# Altium PCB 7segment.PcbDoc
Units mm, origin at the board's own origin, x right, y up, seen from the top; angles counter-clockwise.
Board outline 90.04 x 52.07 mm, 2 copper layers (Top Layer, Bottom Layer); 11 components, 20 nets, 44 pads, 0 vias.
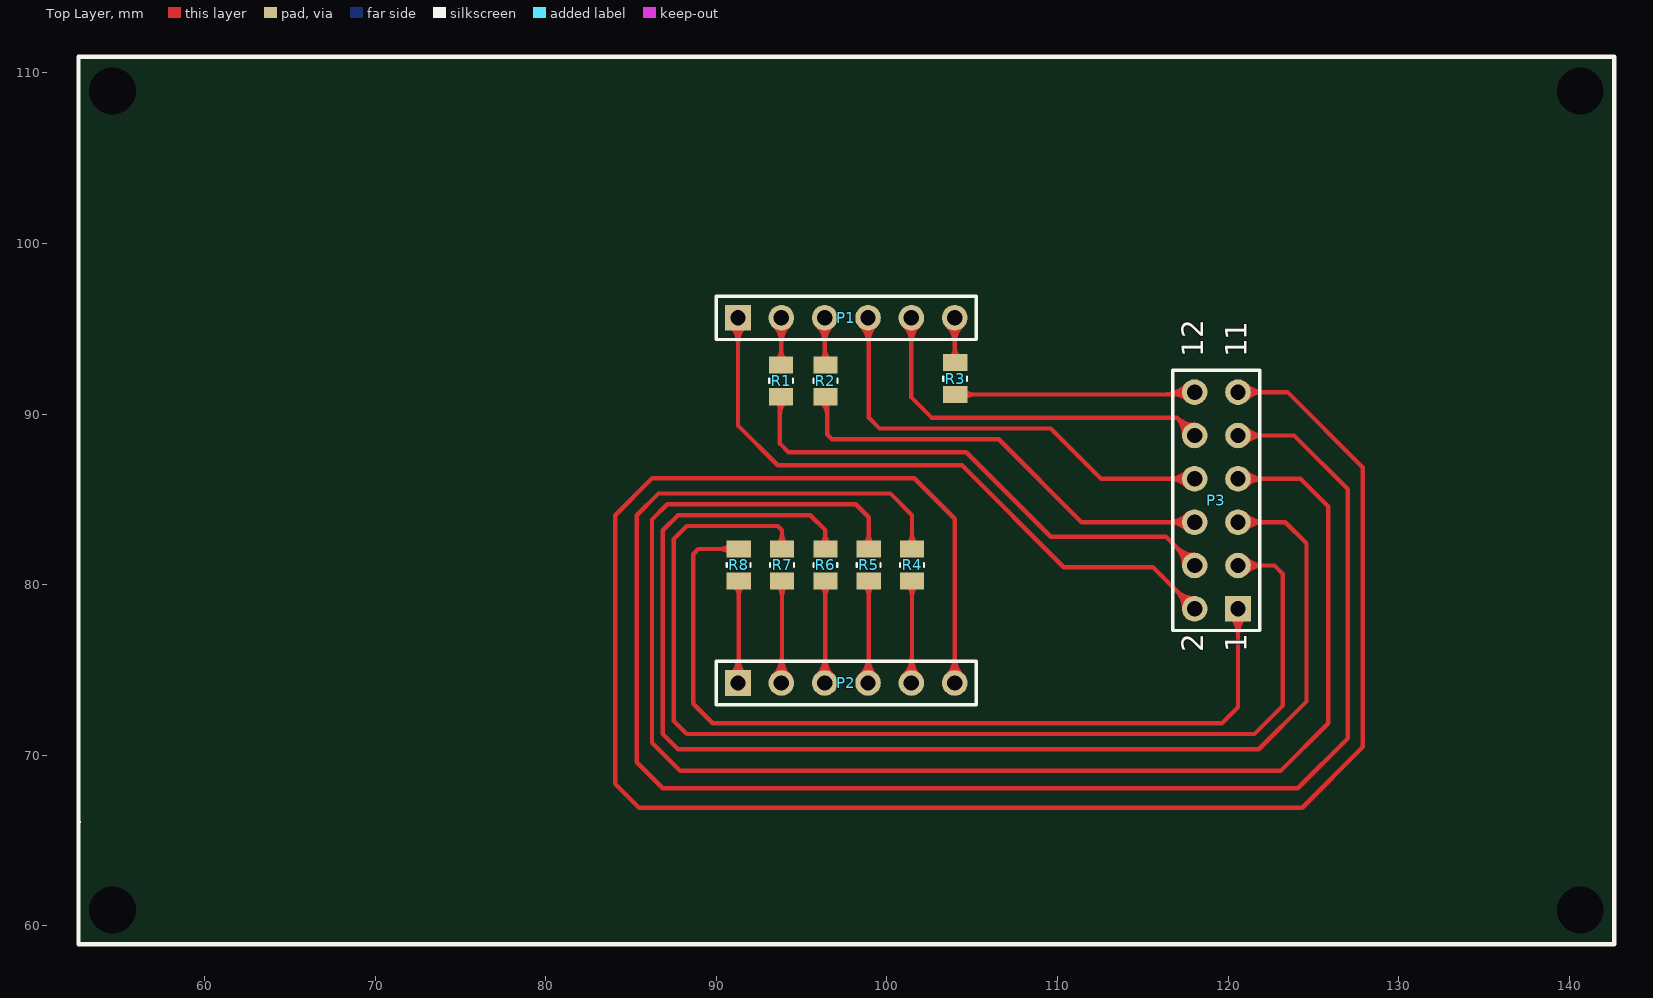
[diagram p0: Top Layer view]
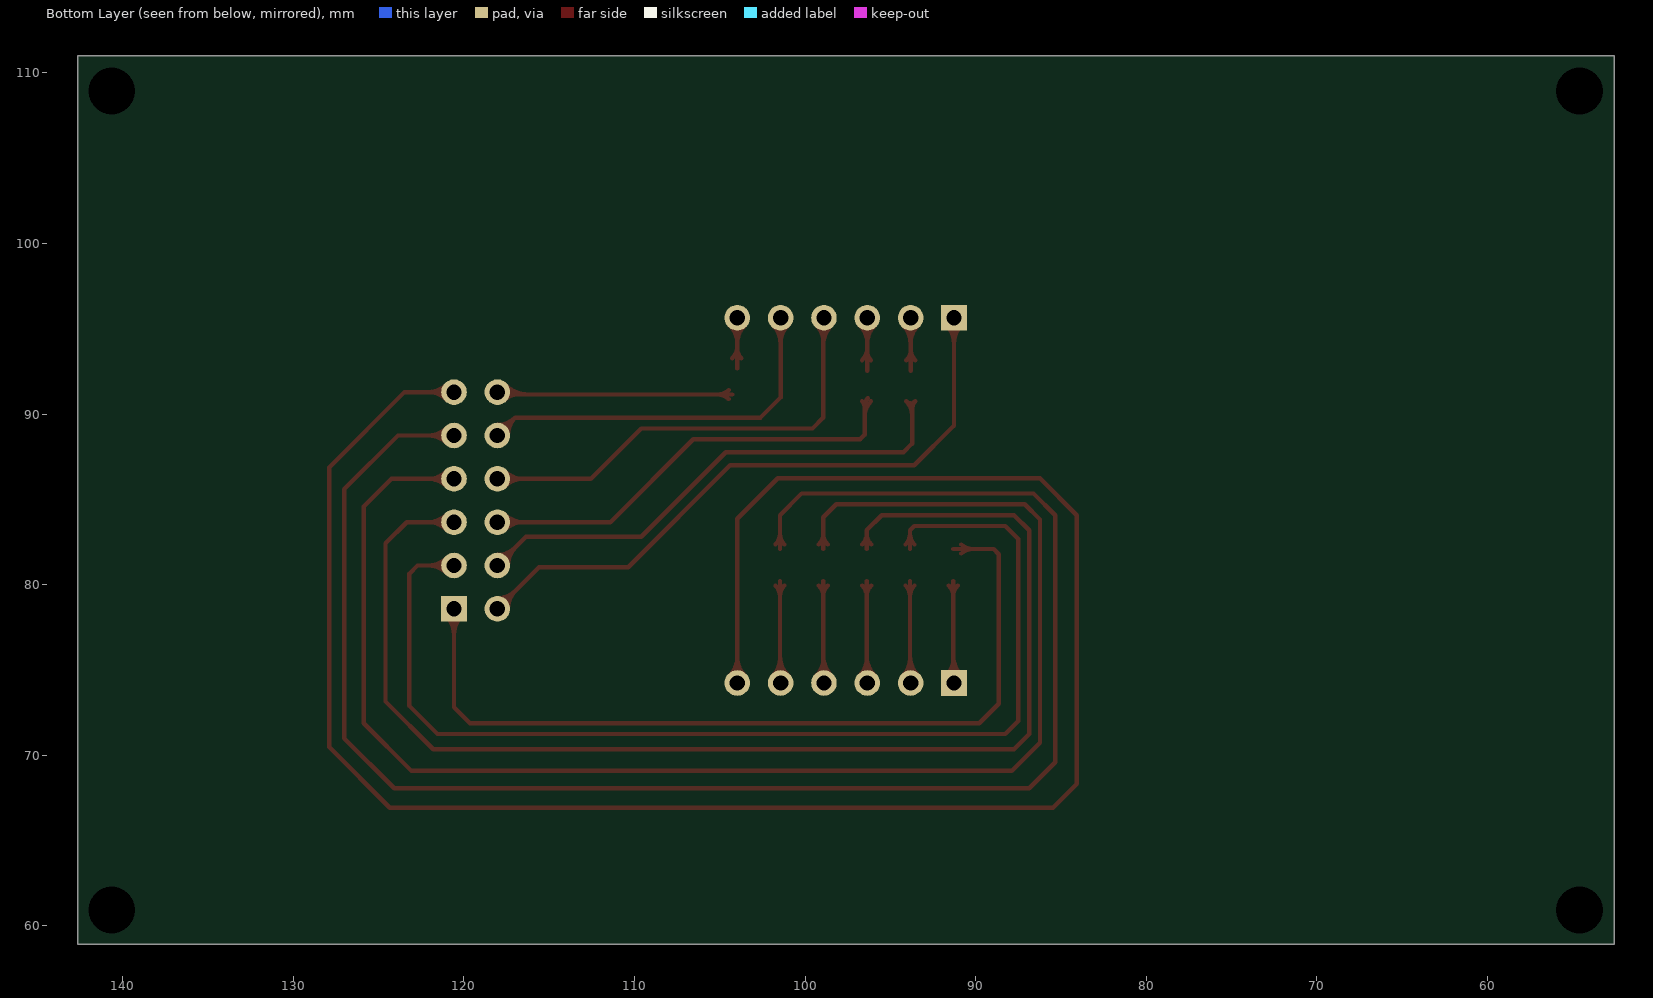
[diagram p1: Bottom Layer view, seen from below]

## Layer stack, top to bottom
Top Layer: signal copper 0.0356
Dielectric: dielectric 0.32, FR-4, Dk 4.8
Bottom Layer: signal copper 0.0356

## Board outline
52.578,58.928 142.621,58.928 142.621,110.998 52.578,110.998

## Design rules (kind name [scope] priority, off if disabled: settings)
Clearance [All] p1: gap=0.254
PolygonConnect [All] p1: connectstyle=Relief reliefconductorwidth=0.254 reliefentries=4 polygonreliefangle="90 Angle"
RoomDefinition 7segment [InComponentClass('7segment')] p1: confinementstyle=ConfineIn formatcopy=TRUE lockcomponents=FALSE outline 161.417,37.338 41.021,37.338 41.021,127.508 161.417,127.508
RoutingVias [All] p1: holewidth=0.711 width=1.27 viastyle="Through Hole" minholewidth=0.711 minwidth=1.27 maxholewidth=0.711 maxwidth=1.27
SilkToSilkClearance [All] p1: silktosilkclearance=0.104
SilkscreenOverComponentPads [All] p1: minsilkscreentomaskgap=0.104
SolderMaskExpansion [All] p1: expansion=0.102
Width [All] p1: maxlimit=1 minlimit=0.254 preferedwidth=0.5
26 further rules are at their usual default settings.

## Components (designator, comment, footprint, x,y, rotation, side; value= is the part's Value field where it differs from the comment)
P1 "Header 6" HDR1X6 91.274,95.64 r0 top
P2 "Header 6" HDR1X6 91.274,74.24 r0 top
P3 "Header 6X2" HDR2X6 120.572,78.584 r90 top
R1 "1623401-1" RESC2012X65N 93.8,91.948 r90 top
R2 "1623401-1" RESC2012X65N 96.4,91.948 r90 top
R3 "1623401-1" RESC2012X65N 104,92.075 r90 top
R4 "1623401-1" RESC2012X65N 101.473,81.153 r270 top
R5 "1623401-1" RESC2012X65N 98.933,81.153 r270 top
R6 "1623401-1" RESC2012X65N 96.393,81.153 r270 top
R7 "1623401-1" RESC2012X65N 93.853,81.153 r270 top
R8 "1623401-1" RESC2012X65N 91.313,81.153 r270 top

## Footprints (in the part's own frame and the unit in brackets; to place one, negate y for a bottom-side part, rotate by r counter-clockwise, add the part's x,y. Pads: shape width x height; smd on the part's side, far side on the other; paste and mask are expansions set on the pad)
HDR1X6 [mm] "Connector; Header; 6 Position"
  rect 1.5x1.5 hole 0.9: 1(0,0)
  round 1.5 hole 0.9: 2(2.54,0) 3(5.08,0) 4(7.62,0) 5(10.16,0) 6(12.7,0)
  silkscreen extent -1.27,-1.27 13.97,1.27
HDR2X6 [mm] "Connector; Header; 6x2 Position"
  rect 1.5x1.5 hole 0.9: 1(0,0)
  round 1.5 hole 0.9: 2(0,2.54) 3(2.54,0) 4(2.54,2.54) 5(5.08,0) 6(5.08,2.54) 7(7.62,0) 8(7.62,2.54) 9(10.16,0) 10(10.16,2.54) 11(12.7,0) 12(12.7,2.54)
  silkscreen extent -1.27,-1.27 13.97,3.81
RESC2012X65N [mm]
  rect 1x1.42 smd: 1(-0.935,0) 2(0.935,0)
  silkscreen extent -0.12,-0.7 0.12,0.7

## Part data
P1 P2: "Header, 6-Pin"
P3: "Header, 6-Pin, Dual row"
R1 R2 R3 R4 R5 R6 R7 R8: library part CRG0805ZR, "Res Thick Film 0805 0 Ohm Molded SMD SMD T/R"

## Free pads (board coordinates)
  round 1.524 hole 2.75: 0(54.627,108.936) 1(54.627,60.937) 2(140.629,60.937) 3(140.629,108.936)

## Nets (pads, with @x,y where several pads share a name; then routed paths per layer and width w, separated by ;. In a path a pad name is that pad's centre, name@x,y a point inside that pad or via, vN(x,y) a via of type N, cw(c..) or ccw(c..) an arc to the next point about the centre after c; other vN are vias at no path point)
A: P1.2 R1.2 | length 8.3
  Top Layer w0.254: P1.2@93.373,95.199 cw(c92.31,94.136) 93.814,94.136 cw(c95.318,94.136) P1.2@94.255,95.199 ; R1.2@93.536,93.147 ccw(c92.866,93.817) 93.814,93.817 ; P1.2@93.553,95.379 cw(c92.923,94.749) 93.814,94.749 cw(c94.705,94.749) P1.2@94.075,95.379 ; R1.2@93.814,92.541 P1.2 ; 93.814,93.75 ccw(c94.667,93.75) R1.2@94.064,93.147
B: P1.6 R3.2 | length 8.1
  Top Layer w0.254: P1.6@103.533,95.199 cw(c102.47,94.136) 103.974,94.136 cw(c105.478,94.136) P1.6@104.415,95.199 ; P1.6@103.713,95.379 cw(c103.083,94.749) 103.974,94.749 cw(c104.865,94.749) P1.6@104.235,95.379 ; R3.2@103.736,93.274 ccw(c103.162,93.848) 103.974,93.848 ; R3.2@103.974,92.668 P1.6 ; 103.974,93.973 ccw(c104.963,93.973) R3.2@104.264,93.274
C: P2.4 R5.2 | length 11.1
  Top Layer w0.254: P2.4@98.453,74.681 ccw(c97.296,75.838) 98.933,75.838 ; P2.4@98.633,74.501 ccw(c97.909,75.225) 98.933,75.225 ; R5.2@98.669,79.954 cw(c98.033,79.318) 98.933,79.318 cw(c99.833,79.318) R5.2@99.197,79.954 ; P2.4@98.933,74.279 R5.2 ; 98.933,75.037 ccw(c99.691,75.037) P2.4@99.155,74.501 ; 98.933,75.65 ccw(c100.304,75.65) P2.4@99.335,74.681
D: P2.2 R7.2 | length 11.1
  Top Layer w0.254: P2.2@93.373,74.681 ccw(c92.216,75.838) 93.853,75.838 ; P2.2@93.553,74.501 ccw(c92.829,75.225) 93.853,75.225 ; R7.2@93.589,79.954 cw(c92.953,79.318) 93.853,79.318 cw(c94.753,79.318) R7.2@94.117,79.954 ; P2.2@93.853,74.279 R7.2 ; 93.853,75.037 ccw(c94.611,75.037) P2.2@94.075,74.501 ; 93.853,75.65 ccw(c95.224,75.65) P2.2@94.255,74.681
DIG1: P1.1 P3.2 | length 45
  Top Layer w0.254: P1.1@90.833,95.199 cw(c89.77,94.136) 91.274,94.136 cw(c92.778,94.136) P1.1@91.715,95.199 ; P1.1@91.013,95.379 cw(c90.383,94.749) 91.274,94.749 cw(c92.165,94.749) P1.1@91.535,95.379 ; P1.1 91.274,89.32 93.599,86.995 104.394,86.995 110.363,81.026 115.59,81.026 P3.2 ; P3.2@117.409,78.584 ccw(c115.905,78.584) 116.968,79.648 ccw(c118.032,80.711) P3.2@118.032,79.207 ; P3.2@117.663,78.584 ccw(c116.772,78.584) 117.402,79.214 ccw(c118.032,79.844) P3.2@118.032,78.953
DIG2: P1.4 P3.8 | length 33.9
  Top Layer w0.254: P1.4@98.453,95.199 cw(c97.296,94.042) 98.933,94.042 ; P1.4@98.633,95.379 cw(c97.909,94.655) 98.933,94.655 ; 98.933,94.23 cw(c100.304,94.23) P1.4@99.335,95.199 ; 98.933,94.843 cw(c99.691,94.843) P1.4@99.155,95.379 ; P1.4@98.933,95.601 98.933,89.789 99.568,89.154 109.601,89.154 112.551,86.204 P3.8 ; P3.8@117.591,85.763 ccw(c116.528,84.7) 116.528,86.204 ccw(c116.528,87.708) P3.8@117.591,86.645 ; P3.8@117.771,85.943 ccw(c117.141,85.313) 117.141,86.204 ccw(c117.141,87.095) P3.8@117.771,86.465
DIG3: P1.5 P3.10 | length 29.6
  Top Layer w0.254: P1.5@100.993,95.199 cw(c99.93,94.136) 101.434,94.136 cw(c102.938,94.136) P1.5@101.875,95.199 ; P1.5@101.173,95.379 cw(c100.543,94.749) 101.434,94.749 cw(c102.325,94.749) P1.5@101.695,95.379 ; P1.5 101.434,90.971 102.616,89.789 116.987,89.789 ; P3.10@117.409,88.752 ccw(c115.968,88.77) 116.987,89.789 ; P3.10@117.663,88.749 ccw(c116.81,88.759) 117.413,89.363 ccw(c118.017,89.966) P3.10@118.027,89.113 ; P3.10@118.024,89.367 cw(c118.006,90.808) 116.987,89.789 ; P3.10 116.987,89.789
DIG4: P2.6 P3.11 | length 126.1
  Top Layer w0.254: P2.6@103.533,74.681 ccw(c102.47,75.744) 103.974,75.744 ccw(c105.478,75.744) P2.6@104.415,74.681 ; P2.6@103.713,74.501 ccw(c103.083,75.131) 103.974,75.131 ccw(c104.865,75.131) P2.6@104.235,74.501 ; P2.6 103.974,83.859 101.6,86.233 86.233,86.233 84.074,84.074 84.074,68.326 85.471,66.929 124.333,66.929 127.889,70.485 127.889,86.868 123.473,91.284 P3.11 ; P3.11@120.833,91.023 cw(c121.463,90.393) 121.463,91.284 cw(c121.463,92.175) P3.11@120.833,91.545 ; P3.11@121.013,90.843 cw(c122.076,89.78) 122.076,91.284 cw(c122.076,92.788) P3.11@121.013,91.725
DP: P2.3 R6.2 | length 11.1
  Top Layer w0.254: P2.3@95.913,74.681 ccw(c94.756,75.838) 96.393,75.838 ; P2.3@96.093,74.501 ccw(c95.369,75.225) 96.393,75.225 ; R6.2@96.129,79.954 cw(c95.493,79.318) 96.393,79.318 cw(c97.293,79.318) R6.2@96.657,79.954 ; P2.3@96.393,74.279 R6.2 ; 96.393,75.037 ccw(c97.151,75.037) P2.3@96.615,74.501 ; 96.393,75.65 ccw(c97.764,75.65) P2.3@96.795,74.681
E: P2.1 R8.2 | length 11.1
  Top Layer w0.254: P2.1@90.833,74.681 ccw(c89.676,75.838) 91.313,75.838 ; P2.1@91.013,74.501 ccw(c90.289,75.225) 91.313,75.225 ; R8.2@91.049,79.954 cw(c90.413,79.318) 91.313,79.318 cw(c92.213,79.318) R8.2@91.577,79.954 ; P2.1@91.313,74.279 R8.2 ; 91.313,75.037 ccw(c92.071,75.037) P2.1@91.535,74.501 ; 91.313,75.65 ccw(c92.684,75.65) P2.1@91.715,74.681
F: P1.3 R2.2 | length 8.3
  Top Layer w0.254: P1.3@95.913,95.199 cw(c94.85,94.136) 96.354,94.136 cw(c97.858,94.136) P1.3@96.795,95.199 ; P1.3@96.093,95.379 cw(c95.463,94.749) 96.354,94.749 cw(c97.245,94.749) P1.3@96.615,95.379 ; R2.2@96.136,93.147 ccw(c95.611,93.672) 96.354,93.672 ; R2.2@96.354,92.541 P1.3 ; 96.354,93.895 ccw(c97.412,93.895) R2.2@96.664,93.147
G: P2.5 R4.2 | length 11.1
  Top Layer w0.254: P2.5@100.993,74.681 ccw(c99.836,75.838) 101.473,75.838 ; P2.5@101.173,74.501 ccw(c100.449,75.225) 101.473,75.225 ; R4.2@101.209,79.954 cw(c100.573,79.318) 101.473,79.318 cw(c102.373,79.318) R4.2@101.737,79.954 ; P2.5@101.473,74.279 R4.2 ; 101.473,75.037 ccw(c102.231,75.037) P2.5@101.695,74.501 ; 101.473,75.65 ccw(c102.844,75.65) P2.5@101.875,74.681
NetP3_1: P3.1 R8.1 | length 55.3
  Top Layer w0.254: R8.1@90.839,81.824 ccw(c90.203,81.188) 90.203,82.088 ccw(c90.203,82.988) R8.1@90.839,82.352 ; R8.1 88.946,82.088 88.646,81.788 88.646,73.025 89.789,71.882 119.634,71.882 120.572,72.82 P3.1 ; P3.1@120.131,78.143 cw(c119.068,77.08) 120.572,77.08 cw(c122.076,77.08) P3.1@121.013,78.143 ; P3.1@120.311,78.323 cw(c119.681,77.693) 120.572,77.693 cw(c121.463,77.693) P3.1@120.833,78.323
NetP3_3: P3.3 R7.1 | length 71
  Top Layer w0.254: R7.1@93.589,82.352 ccw(c92.953,82.988) 93.853,82.988 ccw(c94.753,82.988) R7.1@94.117,82.352 ; R7.1 93.853,83.185 93.599,83.439 88.265,83.439 87.503,82.677 87.503,72.009 88.265,71.247 121.539,71.247 123.19,72.898 123.19,80.645 122.711,81.124 P3.3 ; P3.3@120.833,80.863 cw(c121.463,80.233) 121.463,81.124 cw(c121.463,82.015) P3.3@120.833,81.385 ; P3.3@121.013,80.683 cw(c122.076,79.62) 122.076,81.124 cw(c122.076,82.628) P3.3@121.013,81.565
NetP3_4: P3.4 R1.1 | length 35.1
  Top Layer w0.254: R1.1@93.536,90.749 cw(c93.078,90.291) 93.726,90.291 ; R1.1@93.616,90.689 cw(c93.509,90.5) 93.726,90.5 cw(c93.871,90.5) R1.1@93.851,90.644 ; 93.726,89.934 cw(c94.879,89.934) R1.1@94.064,90.749 ; 93.726,90.505 93.726,88.265 94.234,87.757 104.648,87.757 109.601,82.804 116.352,82.804 P3.4 ; P3.4@117.409,81.124 ccw(c115.905,81.124) 116.968,82.188 ccw(c118.032,83.251) P3.4@118.032,81.747 ; P3.4@117.663,81.124 ccw(c116.772,81.124) 117.402,81.754 ccw(c118.032,82.384) P3.4@118.032,81.493
NetP3_5: P3.5 R6.1 | length 81.5
  Top Layer w0.254: R6.1@96.129,82.352 ccw(c95.493,82.988) 96.393,82.988 ccw(c97.293,82.988) R6.1@96.657,82.352 ; R6.1 96.393,83.185 95.504,84.074 87.757,84.074 86.868,83.185 86.868,71.247 87.757,70.358 121.793,70.358 124.587,73.152 124.587,82.423 123.346,83.664 P3.5 ; P3.5@120.833,83.403 cw(c121.463,82.773) 121.463,83.664 cw(c121.463,84.555) P3.5@120.833,83.925 ; P3.5@121.013,83.223 cw(c122.076,82.16) 122.076,83.664 cw(c122.076,85.168) P3.5@121.013,84.105
NetP3_6: P3.6 R2.1 | length 31.5
  Top Layer w0.254: R2.1@96.136,90.749 cw(c95.258,89.871) 96.5,89.871 ; R2.1@96.316,90.929 cw(c95.871,90.484) 96.5,90.484 ; R2.1@96.366,90.642 cw(c96.353,90.495) 96.5,90.495 cw(c96.754,90.495) R2.1@96.611,90.705 ; 96.5,90.354 cw(c97.059,90.354) R2.1@96.664,90.749 ; 96.5,90.505 96.5,89.027 96.5,88.793 96.774,88.519 106.553,88.519 111.408,83.664 P3.6 ; P3.6@117.591,83.223 ccw(c116.528,82.16) 116.528,83.664 ccw(c116.528,85.168) P3.6@117.591,84.105 ; P3.6@117.771,83.403 ccw(c117.141,82.773) 117.141,83.664 ccw(c117.141,84.555) P3.6@117.771,83.925
NetP3_7: P3.7 R5.1 | length 93.6
  Top Layer w0.254: R5.1@98.669,82.352 ccw(c98.033,82.988) 98.933,82.988 ccw(c99.833,82.988) R5.1@99.197,82.352 ; R5.1 98.933,83.947 98.171,84.709 87.122,84.709 86.233,83.82 86.233,70.739 87.884,69.088 123.063,69.088 125.857,71.882 125.857,84.582 124.235,86.204 P3.7 ; P3.7@120.833,85.943 cw(c121.463,85.313) 121.463,86.204 cw(c121.463,87.095) P3.7@120.833,86.465 ; P3.7@121.013,85.763 cw(c122.076,84.7) 122.076,86.204 cw(c122.076,87.708) P3.7@121.013,86.645
NetP3_9: P3.9 R4.1 | length 104.7
  Top Layer w0.254: R4.1@101.209,82.352 ccw(c100.573,82.988) 101.473,82.988 ccw(c102.373,82.988) R4.1@101.737,82.352 ; R4.1 101.473,84.074 100.203,85.344 86.614,85.344 85.344,84.074 85.344,69.596 86.868,68.072 124.079,68.072 127,70.993 127,85.598 123.854,88.744 P3.9 ; P3.9@120.833,88.483 cw(c121.463,87.853) 121.463,88.744 cw(c121.463,89.635) P3.9@120.833,89.005 ; P3.9@121.013,88.303 cw(c122.076,87.24) 122.076,88.744 cw(c122.076,90.248) P3.9@121.013,89.185
NetP3_12: P3.12 R3.1 | length 18.7
  Top Layer w0.254: R3.1@104.267,91.14 117.888,91.14 P3.12 ; R3.1@104.474,90.876 cw(c105.11,90.24) 105.11,91.14 cw(c105.11,92.04) R3.1@104.474,91.404 ; 116.18,91.14 ccw(c116.18,93.136) P3.12@117.591,91.725 ; 116.794,91.14 ccw(c116.794,92.522) P3.12@117.771,91.545 ; 116.876,91.14 cw(c116.876,90.128) P3.12@117.591,90.843

## Silkscreen, mask and mechanical layers (free items; w line width, h text height)
Top Overlay:
  lines w0.254: 52.625,58.934 52.625,110.939 ; 52.625,66.12 52.658,66.087 ; 52.658,58.934 142.621,58.934 ; 52.705,110.939 142.621,110.939 ; 142.625,58.934 142.625,110.939

## Dimensions
140.629,108.936 to 140.629,60.937 on Mechanical 13
103.974,74.24 to 103.974,95.64 on Mechanical 13

## Text inside footprints (layer, text, board x,y; h text height)
P3: Top Overlay "2" at 118.54,76.044 h1.27 r90; Top Overlay "1" at 121.08,76.044 h1.27 r90; Top Overlay "1" at 121.08,93.316 h1.27 r90; Top Overlay "1" at 121.08,94.332 h1.27 r90; Top Overlay "12" at 118.54,93.316 h1.27 r90